# Altium PCB Interface-PCB.PcbDoc
Units mil, origin at the board's own origin, x right, y up, seen from the top; angles counter-clockwise.
Board outline 1200.79 x 860 mil, 2 copper layers (Top Layer, Bottom Layer); 16 components, 12 nets, 39 pads, 2 vias.
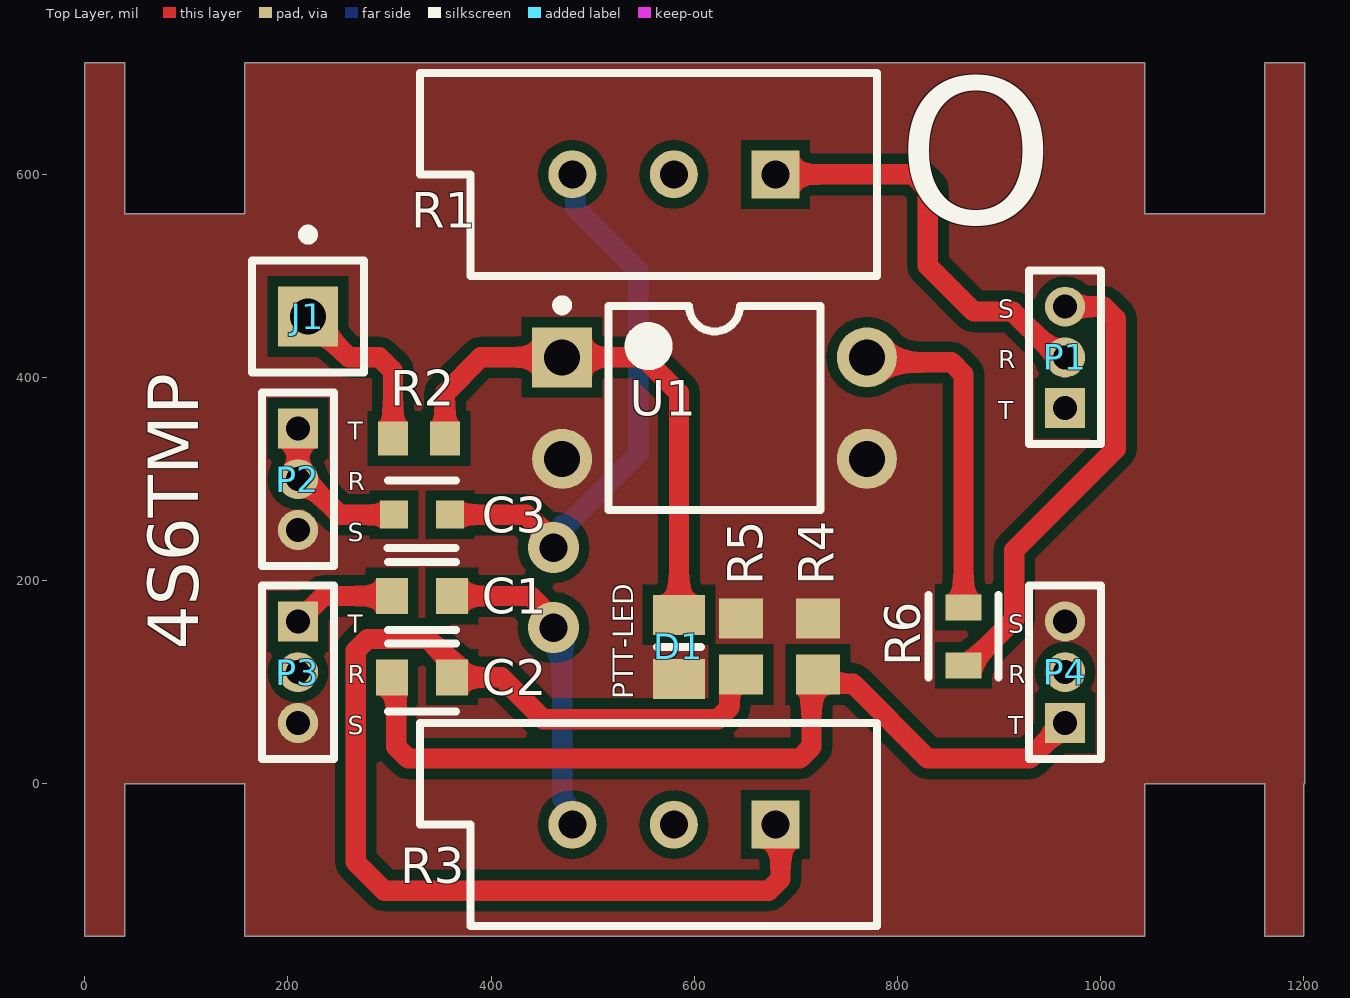
[diagram p0: Top Layer view]
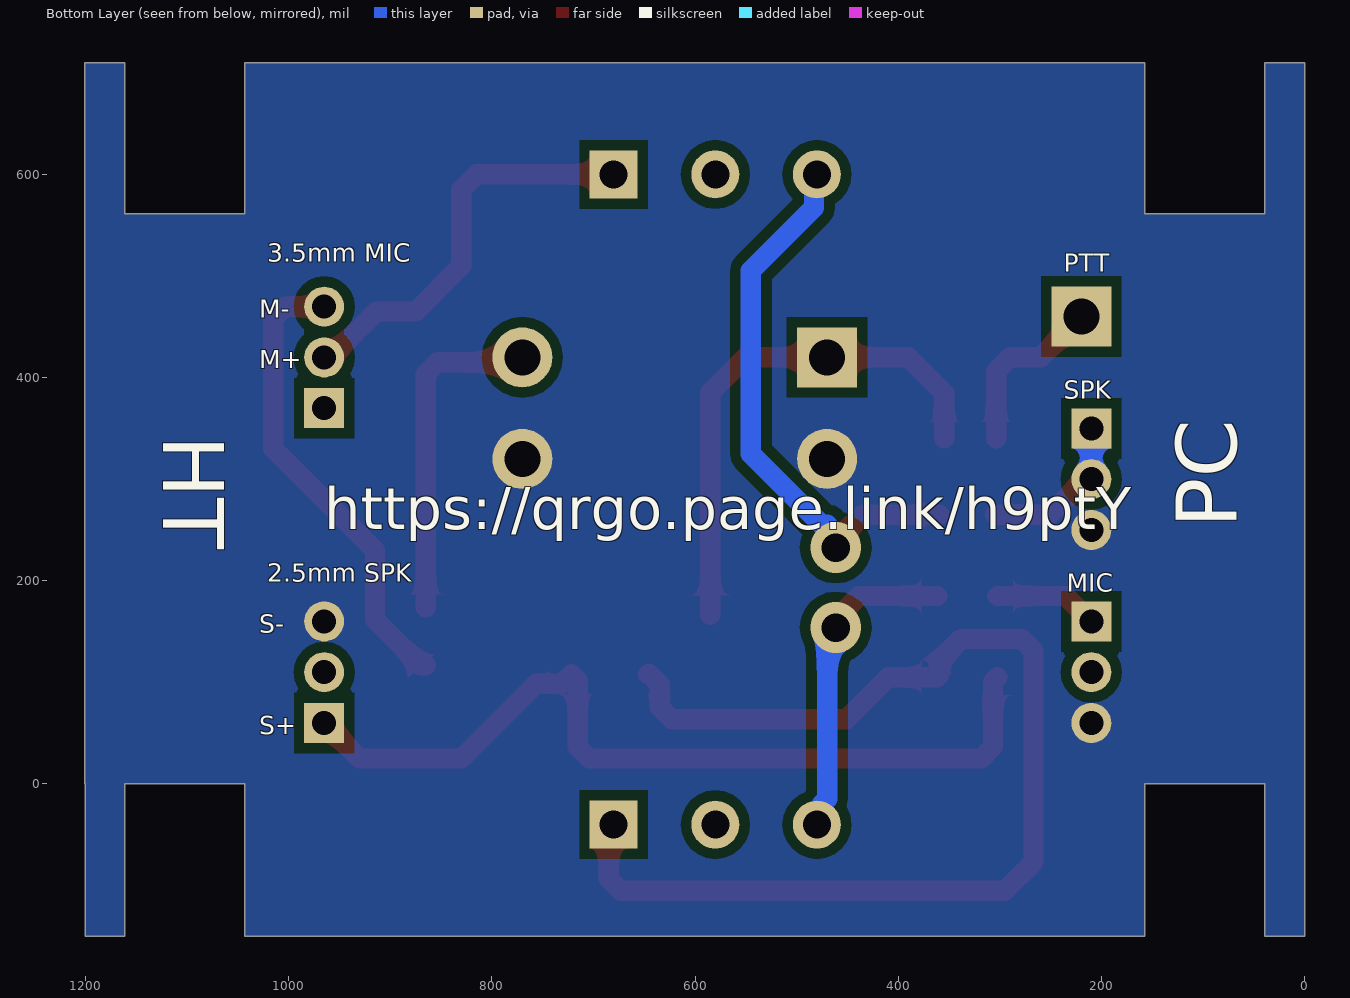
[diagram p1: Bottom Layer view, seen from below]

## Layer stack, top to bottom
Top Solder: solder mask 0.4, Solder Resist, Dk 3.5
Top Layer: signal copper 1.4
Dielectric 1: dielectric 12.6, FR-4, Dk 4.8
Bottom Layer: signal copper 1.4
Bottom Solder: solder mask 0.4, Solder Resist, Dk 3.5

## Board outline
1200,0 1200,-150 1161.42,-150 1161.42,0 1043.31,0 1043.31,-150 157.48,-150 157.48,0 39.37,0 39.37,-150 0,-150 0,710 39.37,710 39.37,561.02 157.48,561.02 157.48,710 1043.31,710 1043.31,561.02 1161.42,561.02 1161.42,710 1200.79,710 1200.79,0

## Design rules (kind name [scope] priority, off if disabled: settings)
Clearance [All] p1: gap=10 ignorepadtopadclearanceinfootprint=TRUE except(0: Arc-Hole Track-Hole SMDPad-Hole THPad-Hole Via-Hole Fill-Hole Poly-Hole Region-Hole Text-Hole)
MinimumSolderMaskSliver [All] p1 off: minsoldermaskwidth=2
PolygonConnect [All] p1: connectstyle=Relief reliefconductorwidth=10 reliefentries=4 polygonreliefangle="90 Angle" airgapwidth=10
RoomDefinition HT-TRS-Interface-Schematic [InComponentClass('HT-TRS-Interface-Schematic')] p1 off: confinementstyle=ConfineIn formatcopy=TRUE lockcomponents=FALSE outline 100,5 1080,5 1080,555 100,555
RoutingVias [All] p1: holewidth=28 width=50 viastyle="Through Hole" minholewidth=28 minwidth=50 maxholewidth=28 maxwidth=50
SilkToSilkClearance [All] p1 off: silktosilkclearance=10
SilkToSolderMaskClearance [IsPad] p1: minsilkscreentomaskgap=6 clearancetoexposedcopper=TRUE
SolderMaskExpansion [All] p1: expansion=4 istentingtop=FALSE
Width [All] p1: maxlimit=20 minlimit=15 preferedwidth=15
27 further rules are at their usual default settings.

## Classes and differential pairs
component class HT-TRS-Interface-Schematic: C1 C2 C3 J1 P1 P2 P3 P4 R1 R2 R3 R4 R5 R6 U1

## Components (designator, comment, footprint, x,y, rotation, side; value= is the part's Value field where it differs from the comment)
C1 "10nF" FP-CC0603-DA-MFG 332.13,185 r0 top value="10 nF"
C2 "10nF" FP-CC0603-DA-MFG 332.13,105 r180 top value="10 nF"
C3 "10uF" FP-C1608-MFG 332.13,265 r0 top
D1 "PTT-LED" 6-0805_L 585,135 r270 top
J1 "PTT GPIO" PIN1 219.84,460 r0 top
P1 "HT 3.5mm-MIC Input" MHDR1X3 965,369.84 r90 top net-tie
P2 "USB SC-SPK Output" MHDR1X3 210,350 r270 top net-tie
P3 "USB SC-MIC Input" MHDR1X3 210,160 r270 top net-tie
P4 "HT 2.5mm-SPK Output" MHDR1X3 965,60 r90 top net-tie
R1 "RPot" VR5 580,600 r180 top value=1K
R2 "330R" RESC1608X55X30LL15T15 329.17,340 r0 top
R3 "RPot" VR5 580,-40 r180 top value=1K
R4 "2.2K" RESC1608X55X30ML20T20 721.73,135.47 r270 top
R5 "2.2K" RESC1608X55X30ML20T20 646.13,135.47 r270 top
R6 "0R" FP-ERJ-3GEY0R00V-MFG 865,145.38 r270 top value=0Ω
U1 "EL817" DIP-4 620,369.96 r0 top

## Footprints (in the part's own frame and the unit in brackets; to place one, negate y for a bottom-side part, rotate by r counter-clockwise, add the part's x,y. Pads: shape width x height; smd on the part's side, far side on the other; paste and mask are expansions set on the pad)
6-0805_L [mm] "Chip Resistor, Body 2.0x1.2mm, IPC High Density"
  rect 1x1.3 smd: 1(-0.8,0) 2(0.8,0)
  silkscreen extent 0,-0.55 0,0.55, body extent -1.07,-0.7 1.07,0.7, height 0.7
DIP-4 [mm] "DIP; 4 Leads; Row Spacing 7.62 mm; Pitch 2.54 mm"
  rect 1.5x1.5 hole 0.9: 1(-3.81,1.27)
  round 1.5 hole 0.9: 2(-3.81,-1.27) 3(3.81,-1.27) 4(3.81,1.27)
  silkscreen extent -3.93,-2.55 2.65,2.69, body extent -3.15,-2.5 3.15,2.5, height 5.6
FP-C1608-MFG [mm]
  rect 0.7x0.7 smd paste+0 mask+0: 1(-0.7,0) 2(0.7,0)
  silkscreen extent -0.86,-0.83 0.85,0.85, body extent -1.15,-0.55 1.15,0.55, height 0.25
FP-CC0603-DA-MFG [mm]
  rect 0.8x0.9 smd paste+0 mask+0: 1(-0.75,0) 2(0.75,0)
  silkscreen extent -0.85,-0.85 0.85,0.85, body extent -1.35,-0.75 1.35,0.75, height 0.25
FP-ERJ-3GEY0R00V-MFG [mm]
  rect 0.65x0.9 smd paste+0 mask+0: 1(-0.725,0) 2(0.725,0)
  silkscreen extent -1.03,-0.87 1.03,0.87, body extent -1.15,-0.58 1.15,0.58, height 0.25
MHDR1X3 [mm] "Connector; Header; 3 Position"
  rect 1x1 hole 0.6: 1(0,0)
  round 1 hole 0.6: 2(1.27,0) 3(2.54,0)
  silkscreen extent -0.9,-0.9 3.44,0.9
PIN1 [mm] "Connector; Plug"
  rect 1.5x1.5 hole 0.9: 1(0,0)
  silkscreen extent -1.4,-1.4 1.4,2.17
RESC1608X55X30LL15T15 [mm] "Chip Resistor, 2-Leads, Body 1.75x0.95mm, IPC High Density"
  rect 0.75x0.85 smd: 1(-0.65,0) 2(0.65,0)
  body extent -0.87,-0.48 0.87,0.48, height 0.55
RESC1608X55X30ML20T20 [mm] "Chip Resistor, 2-Leads, Body 1.60x0.80mm, IPC Low Density"
  rect 1x1.1 smd: 1(-0.7,0) 2(0.7,0)
  body extent -0.9,-0.5 0.9,0.5, height 0.55
VR5 [mm] "Thru-Hole; 3 Leads"
  rect 1.2x1.2 hole 0.7: 1(-2.54,0)
  round 1.2 hole 0.7: 2(0,0) 3(2.54,0)
  silkscreen extent -5.08,-2.54 6.35,2.54

## Part data
C1 C2: library part CMP-03422-000327-1, "CAP CER 10000PF 25V X7R 0603", Capacitance="10 nF", Manufacturer=YAGEO, Manufacturer Part Number=CC0603KRX7R8BB103, Package=CC0603-DA, Temperature="-55°C to +125°C", Temperature Characteristic=X7R, Temperature Coefficient=15%, Temperature Range High=+125°C, Temperature Range Low=-55°C, Tolerance=0.1, Voltage="25 V", Automotive=No, Category=Cap, ComponentLink2Description=Datasheet, ComponentLink2URL=http://www.yageo.com/documents/recent/UPY-GPHC_X7R_6.3V-to-50V_18.pdf, Device Class L1="Passive Components", Device Class L2=Capacitors, Device Class L3="Ceramic Capacitors", Digikey Description="CAP CER 10000PF 25V X7R 0603", Footprint Url=http://www.yageo.com/exep/pages/download/literatures/UPY-C_GEN_24.pdf, Height=0.9mm, Lead Free=Yes, Material=Ceramic, Mouser Description="Multilayer Ceramic Capacitors MLCC - SMD/SMT 10nF 25V X7R 10%", Octopart=https://octopart.com/cc0603krx7r8bb103-yageo-9288195, RoHS=TRUE, Voltage Rating="25 V"
C3: library part CMP-08246-000019-1, "CAP CER 10UF 16V X5R 0603", Manufacturer="TDK Corporation", Manufacturer Part Number=C1608X5R1C106M080AB, Package=C1608, Temperature="-55°C to +85°C", Temperature Characteristic=X5R, Temperature Coefficient=15%, Temperature Range High=+85°C, Temperature Range Low=-55°C, Tolerance=20%, Voltage Rating=16V, Automotive=No, Capacitance=10uF, Category=Cap, ComponentLink2Description=Datasheet, ComponentLink2URL=https://upverter.com/datasheet/6fbac97fd59b4a24a005814037d2a36a27db40e9.pdf, Device Class L1="Passive Components", Device Class L2=Capacitors, Device Class L3="Ceramic Capacitors", Digikey Description="CAP CER 10UF 16V X5R 0603", Height=0.9mm, Ipc Land Pattern Name=CAPC16080X80, Lead Free=Yes, Material=Ceramic, Mouser Description="Multilayer Ceramic Capacitors MLCC - SMD/SMT 0603 10uF 16volts X5R +/-20% GP", Octopart=https://octopart.com/c1608x5r1c106m080ab-tdk-26013480, RoHS=TRUE
D1: library part LED2, "Typical RED, GREEN, YELLOW, AMBER GaAs LED", LatestRevisionDate=17-Jul-2002, LatestRevisionNote="Re-released for DXP Platform.", PackageDescription="SM LED; 2 Flat Leads", PackageReference=3.2X1.6X1.1, PackageVersion=Feb-2002, Published=8-Jun-2000, Publisher="Altium Limited"
J1: library part Socket, "Socket", LatestRevisionDate=17-Jul-2002, LatestRevisionNote="Re-released for DXP Platform.", Publisher="Altium Limited"
P1 P2 P3 P4: library part MHDR1X3, "Header, 3-Pin", LatestRevisionDate=17-Jul-2002, LatestRevisionNote="Re-released for DXP Platform.", Publisher="Altium Limited"
R1 R3: "Potentiometer", LatestRevisionDate=17-Jul-2002, LatestRevisionNote="Re-released for DXP Platform.", PackageDescription="Variable Resistor, Thru-Hole; 3 Leads", PackageReference=VR5, Published=8-Jun-2000, Publisher="Altium Limited", Set Position=0.5, Sim Note="Enter the Resistance value and the set point into parameter fields."
R2: library part CMP-2000-00435-2, "Chip Resistor, 330 Ohm, +/- 1%, 0.1 W, -55 to 155 degC, 0603 (1608 Metric), RoHS, Tape and Reel", Current Rating="500 mA", Max Operating Temperature="85 degC", Min Operating Temperature="-25 degC", Package Quantity=1500, Voltage Rating="10 V", ComponentLink1Description="Manufacturer URL", ComponentLink1URL=http://www.panasonic.com/, ComponentLink2Description=Datasheet, ComponentLink2URL=http://industrial.panasonic.com/cdbs/www-data/pdf/RDA0000/AOA0000C86.pdf, Contact Finish=Gold, Contact Material=Copper, Contact Plating=Gold, DatasheetVersion=Apr-15, Gender=Male, Height="1.45 mm", Lead Pitch="1.1 mm", Length="13.7 mm", Mating Cycles=10000, Mount="Surface Mount", PackageDescription="2-Pin Surface Mount Device, Body 1.6 x 0.85 mm", PackageReference=0603, Packaging="Tape and Reel", Pins=8, REACH SVHC="No SVHC", RoHSCompliant=true, Width="1.45 mm"
R4 R5: library part CMP-2000-00955-1, Manufacturer=Panasonic, Part Number=ERA3AEB222V
R6: library part CMP-2000-00700-2, "RES SMD 0 OHM JUMPER 1/10W 0603", Manufacturer=Panasonic, Manufacturer Part Number=ERJ-3GEY0R00V, Package=0603, Power Rating=0.1W, Resistance=0Ω, Temperature="-55°C to +155°C", Temperature Coefficient=-100/+600ppm/°C, Temperature Range High=+155°C, Temperature Range Low=-55°C, Tolerance=5%, Voltage Rating=75V, Automotive=Yes, Automotive Grade="Grade 0", Category=Res, ComponentLink2Description=Datasheet, ComponentLink2URL=https://industrial.panasonic.com/cdbs/www-data/pdf/RDA0000/AOA0000C301.pdf, Composition="Thick Film", Device Class L1="Passive Components", Device Class L2=Resistors, Device Class L3="Chip SMD Resistors", Digikey Description="RES SMD 0 OHM JUMPER 1/10W 0603", Footprint Url=https://industrial.panasonic.com/cdbs/www-data/pdf/RDA0000/DMA0000COL17.pdf, Height=0.55mm, Ipc Land Pattern Name=RESC16080X45, Lead Free=Yes, Mouser Description="Resistor, Chip Thick Film, 0 Ohm, 0.1w, Resistor, Chip Thick Film, 0 Ohm, 0.1w, 5%", Octopart=https://octopart.com/erj-3gey0r00v-panasonic-55389238, RoHS=TRUE, Series=ERJ
U1: library part Optoisolator1, "4-Pin Phototransistor Optocoupler", DatasheetVersion=Nov-2003, LatestRevisionDate=04-Mar-2005, LatestRevisionNote="Sch pins 3 & 4 Swapped.", PackageReference=DIP-4, Published=24-Mar-1999, Publisher="Altium Limited"

## Via types
v1: diameter 50, hole 28, Top Layer to Bottom Layer, 2 vias

## Nets (pads, with @x,y where several pads share a name; then routed paths per layer and width w, separated by ;. In a path a pad name is that pad's centre, name@x,y a point inside that pad or via, vN(x,y) a via of type N, cw(c..) or ccw(c..) an arc to the next point about the centre after c; other vN are vias at no path point)
GND: D1.2 P2.3 P3.3 P4.3 R4.1 R5.1 U1.2 U1.3
NetC1_1: C1.1 P3.1 | length 103
  Top Layer w20: P3.1 235,185 C1.1
NetC1_2: C1.2 R3.3 | length 319.3
  Top Layer w20: C1.2 438.93,185 v1@469.98,153.95
  Bottom Layer w20: v1@469.98,153.95 469.98,-14.66 474.79,-19.47 474.79,-34.79 R3.3
  other v1: 461.47,153.95
NetC2_1: C2.1 R3.1 R5.2 | length 1154.6
  Top Layer w20: R5.2 644.43,107.91 634.74,98.23 634.74,75.53 623.03,63.82 451.18,63.82 410,105 C2.1 360,106.65 360,121 338.28,142.72 278.57,142.72 266.85,131 266.85,-76.85 295,-105 673.28,-105 685,-93.28 685,-45 R3.1
NetC2_2: C2.2 P4.1 R4.2 | length 854.3
  Top Layer w20: C2.2 306.74,100.85 306.74,36.72 318.46,25 703.72,25 715.44,36.72 715.44,101.62 R4.2 730.93,98.71 756.29,98.71 830,25 930,25 P4.1
NetC3_1: C3.1 P2.1 P2.2 | length 209.1
  Top Layer w20: P2.1 P2.2 213.71,296.29 219.83,296.29 251.12,265 C3.1
  Bottom Layer w20: P2.2 P2.1
NetC3_2: C3.2 R1.3 | length 539.9
  Top Layer w20: C3.2 434.76,265 461.47,238.28 v1(461.47,232.69) v1@450.52,243.64
  Bottom Layer w20: v1@470,255 475.08,255 545,324.92 545,505 482.92,567.08 482.92,597.08 R1.3
NetD1_1: D1.1 R2.2 U1.1 | length 522.6
  Top Layer w20: R2.2 354.76,384.76 390,420 U1.1 U1.1 550.04,419.96 585,385 D1.1
NetJ1_1: J1.1 R2.1 | length 172.4
  Top Layer w20: J1.1 259.84,420 290,420 303.58,406.42 R2.1
NetP1_2: P1.2 R1.1 | length 403.6
  Top Layer w20: R1.1 815,600 830,585 830,510 875,465 913.72,465 948.56,430.16 949.44,430.16 959.76,419.84 P1.2
NetP1_3: P1.3 R6.2 | length 461.2
  Top Layer w20: R6.2 869.92,116.83 872.72,119.63 915,161.91 915,230 1015,330 1015,458.13 1003.28,469.84 P1.3
NetR6_1: R6.1 U1.4 | length 331.3
  Top Layer w20: U1.4 774.96,415 853.28,415 865,403.28 R6.1
pads on no net: P1.1 P3.2 P4.2 R1.2 R3.2

## Polygon pours and split planes (outlines as drawn)
GND on Bottom Layer "Bottom GND" (solid, pour order 3): 1200,0 1200,-150 1161.42,-150 1161.42,0 1043.31,0 1043.31,-150 157.48,-150 157.48,0 39.37,0 39.37,-150 0,-150 0,710 39.37,710 39.37,561.02 157.48,561.02 157.48,710 1043.31,710 1043.31,561.02 1161.42,561.02 1161.42,710 1200.79,710 1200.79,0
GND on Top Layer "Top GND" (solid, pour order 2): 1200,0 1200,-150 1161.42,-150 1161.42,0 1043.31,0 1043.31,-150 157.48,-150 157.48,0 39.37,0 39.37,-150 0,-150 0,710 39.37,710 39.37,561.02 157.48,561.02 157.48,710 1043.31,710 1043.31,561.02 1161.42,561.02 1161.42,710 1200.79,710 1200.79,0

## Silkscreen, mask and mechanical layers (free items; w line width, h text height)
Top Overlay:
  text "O" at 799.73,499.14 h275.59
  text "S" at 899,459 h18
  text "R" at 899,409 h18
  text "T" at 899,359 h18
  text "T" at 259,339 h18
  text "R" at 259,289 h18
  text "S" at 259,239 h18
  text "T" at 259,149 h18
  text "S" at 909,149 h18
  text "4S6TMP" at 112,132.29 h50 r90
  text "R" at 259,99 h18
  text "R" at 909,99 h18
  text "S" at 259,49 h18
  text "T" at 909,49 h18
Bottom Overlay:
  text "3.5mm MIC" at 1021,514 h18
  text "PTT" at 236.98,504 h18
  text "M-" at 1028.99,459 h18
  text "M+" at 1028.99,409 h18
  text "SPK" at 236.98,379 h18
  text "HT" at 1123.19,343.19 h60 r90
  text "PC" at 66.81,251.81 h60 r270
  text "https://qrgo.page.link/h9ptY" at 965,237.18 h70.87
  text "2.5mm SPK" at 1021,199 h18
  text "MIC" at 233.99,189 h18
  text "S-" at 1028.99,149 h18
  text "S+" at 1028.99,49 h18
Mechanical 1:
  lines w3: -1.5,-150 ccw(c0,-150) 0,-151.5 ; -1.5,-150 ccw(c0,-150) 0,-151.5 ; -1.5,-150 -1.5,710 ; -1.5,710 cw(c0,710) 0,711.5 ; -1.5,710 cw(c0,710) 0,711.5 ; 0,-151.5 39.37,-151.5 ; 0,711.5 39.37,711.5 ; 37.87,0 cw(c39.37,0) 39.37,1.5 ; 37.87,0 cw(c39.37,0) 39.37,1.5 ; 37.87,0 37.87,-148.5 1.5,-148.5 1.5,708.5 37.87,708.5 37.87,561.02 ; 37.87,561.02 ccw(c39.37,561.02) 39.37,559.52 ; 37.87,561.02 ccw(c39.37,561.02) 39.37,559.52 ; 39.37,-151.5 ccw(c39.37,-150) 40.87,-150 ; 39.37,-151.5 ccw(c39.37,-150) 40.87,-150 ; 39.37,1.5 157.48,1.5 ; 39.37,559.52 157.48,559.52 ; 39.37,711.5 cw(c39.37,710) 40.87,710 ; 39.37,711.5 cw(c39.37,710) 40.87,710 ; 40.87,-150 40.87,-1.5 155.98,-1.5 155.98,-150 ; 40.87,710 40.87,562.52 155.98,562.52 155.98,710 ; 155.98,-150 ccw(c157.48,-150) 157.48,-151.5 ; 155.98,-150 ccw(c157.48,-150) 157.48,-151.5 ; 155.98,710 cw(c157.48,710) 157.48,711.5 ; 155.98,710 cw(c157.48,710) 157.48,711.5 ; 157.48,-151.5 1043.31,-151.5 ; 157.48,1.5 cw(c157.48,0) 158.98,0 ; 157.48,1.5 cw(c157.48,0) 158.98,0 ; 157.48,559.52 ccw(c157.48,561.02) 158.98,561.02 ; 157.48,559.52 ccw(c157.48,561.02) 158.98,561.02 ; 157.48,711.5 1043.31,711.5 ; 158.98,0 158.98,-148.5 1041.81,-148.5 1041.81,0 ; 158.98,561.02 158.98,708.5 1041.81,708.5 1041.81,561.02 ; 1041.81,0 cw(c1043.31,0) 1043.31,1.5 ; 1041.81,0 cw(c1043.31,0) 1043.31,1.5 ; 1041.81,561.02 ccw(c1043.31,561.02) 1043.31,559.52 ; 1041.81,561.02 ccw(c1043.31,561.02) 1043.31,559.52 ; 1043.31,-151.5 ccw(c1043.31,-150) 1044.81,-150 ; 1043.31,-151.5 ccw(c1043.31,-150) 1044.81,-150 ; 1043.31,1.5 1161.42,1.5 ; 1043.31,559.52 1161.42,559.52 ; 1043.31,711.5 cw(c1043.31,710) 1044.81,710 ; 1043.31,711.5 cw(c1043.31,710) 1044.81,710 ; 1044.81,-150 1044.81,-1.5 1159.92,-1.5 1159.92,-150 ; 1044.81,710 1044.81,562.52 1159.92,562.52 1159.92,710 ; 1159.92,-150 ccw(c1161.42,-150) 1161.42,-151.5 ; 1159.92,-150 ccw(c1161.42,-150) 1161.42,-151.5 ; 1159.92,710 cw(c1161.42,710) 1161.42,711.5 ; 1159.92,710 cw(c1161.42,710) 1161.42,711.5 ; 1161.42,-151.5 1200,-151.5 ; 1161.42,1.5 cw(c1161.42,0) 1162.92,0 ; 1161.42,1.5 cw(c1161.42,0) 1162.92,0 ; 1161.42,559.52 ccw(c1161.42,561.02) 1162.92,561.02 ; 1161.42,559.52 ccw(c1161.42,561.02) 1162.92,561.02 ; 1161.42,711.5 1200.79,711.5 ; 1162.92,0 1162.92,-148.5 1198.5,-148.5 1198.5,0 ; 1162.92,561.02 1162.92,708.5 1199.29,708.5 1199.29,1.32 ; 1198.5,0 cw(c1200,0) 1199.29,1.32 ; 1198.5,0 cw(c1200,0) 1199.29,1.32 ; 1200,-151.5 ccw(c1200,-150) 1201.5,-150 ; 1200,-151.5 ccw(c1200,-150) 1201.5,-150 ; 1200.79,711.5 cw(c1200.79,710) 1202.29,710 ; 1200.79,711.5 cw(c1200.79,710) 1202.29,710 ; 1201.5,-150 1201.5,-1.32 ; 1201.5,-1.32 ccw(c1200.79,0) 1202.29,0 ; 1201.5,-1.32 ccw(c1200.79,0) 1202.29,0 ; 1202.29,0 1202.29,710